# EAGLE board micromouse_board_revB_V0.0.1 (EAGLE 9.4.2)

Size 128.4 x 85.52 mm. Coordinates in mm from the lower left corner, seen from the top.
Outline: 56.73,15.45 56.73,0 88.67,0 95.19,3.31 101.32,6.82 107.03,10.54 112.27,14.51 117.01,18.73 121.25,23.21 125.04,27.92 128.4,32.85 128.4,55.45 124.91,59.68 121.03,63.78 116.73,67.75 111.98,71.57 106.78,75.24 101.15,78.77 95.14,82.18 88.79,85.47 56.73,85.52 56.71,70.48 28.44,70.53 21.2,70.45 16.19,80.45 11.18,80.45 0,68.65 0,19.65 11.2,5.45 16.2,5.45 21.2,15.45 56.73,15.45
Copper layers (1+2*15+16): Top 0.0356mm / dielectric 1.5011mm / GND 0.0356mm / dielectric 0.1499mm / AGND 0.0356mm / dielectric 0.2007mm / Bottom 0.0356mm
Design rules "LaenPCBOrder *": minimum track width 6mil, minimum drill 13mil, track to track 6mil, track to pad 6mil, pad to pad 6mil, via to via 6mil, smd to smd 6mil, copper to edge 15mil, drill to drill 6mil, minimum pad ring 7mil, minimum via ring 7mil, stop-mask expansion 3mil, vias tented up to drill 0mil, thermal gap 10mil
Net classes: 0 default: width 0.254 mm, drill 0.178 mm, clearance 0.178 mm
Holes 3 mm at 12.2,10.45 12.2,75.45 61.4,10.45 61.4,75.45
Holes 2.3 mm at 108.4,36.55 108.4,51.35

## Footprints (pad centres in the part's own frame; a part is rotated, then mirrored left to right if it is on the bottom)
0603-CAP = smd 1.1 x 1: 1 -0.85,0; 2 0.85,0
1210 = smd 1.2 x 2: 1 -1.6,0; 2 1.6,0
LQFP-64 = smd 1.473 x 0.229: 1 -5.626,3.75; 2 -5.626,3.25; 3 -5.626,2.75; 4 -5.626,2.25; 5 -5.626,1.75; 6 -5.626,1.25; 7 -5.626,0.75; 8 -5.626,0.25; 9 -5.626,-0.25; 10 -5.626,-0.75; 11 -5.626,-1.25; 12 -5.626,-1.75; 13 -5.626,-2.25; 14 -5.626,-2.75; 15 -5.626,-3.25; 16 -5.626,-3.75; 33 5.626,-3.75; 34 5.626,-3.25; 35 5.626,-2.75; 36 5.626,-2.25; 37 5.626,-1.75; 38 5.626,-1.25; 39 5.626,-0.75; 40 5.626,-0.25; 41 5.626,0.25; 42 5.626,0.75; 43 5.626,1.25; 44 5.626,1.75; 45 5.626,2.25; 46 5.626,2.75; 47 5.626,3.25; 48 5.626,3.75 | smd 0.229 x 1.473: 17 -3.75,-5.626; 18 -3.25,-5.626; 19 -2.75,-5.626; 20 -2.25,-5.626; 21 -1.75,-5.626; 22 -1.25,-5.626; 23 -0.75,-5.626; 24 -0.25,-5.626; 25 0.25,-5.626; 26 0.75,-5.626; 27 1.25,-5.626; 28 1.75,-5.626; 29 2.25,-5.626; 30 2.75,-5.626; 31 3.25,-5.626; 32 3.75,-5.626; 49 3.75,5.626; 50 3.25,5.626; 51 2.75,5.626; 52 2.25,5.626; 53 1.75,5.626; 54 1.25,5.626; 55 0.75,5.626; 56 0.25,5.626; 57 -0.25,5.626; 58 -0.75,5.626; 59 -1.25,5.626; 60 -1.75,5.626; 61 -2.25,5.626; 62 -2.75,5.626; 63 -3.25,5.626; 64 -3.75,5.626
SOT23-5 = smd 0.6 x 1.2: 1 -0.95,-1.306; 2 0,-1.306; 3 0.95,-1.306; 4 0.95,1.306; 5 -0.95,1.306
1X04 = drill 1.016 pad 1.88: 1 0,0; 2 2.54,0; 3 5.08,0; 4 7.62,0
HTSS-103-XX-XX-D = drill 1.016 pad 1.524: 1 -2.54,-1.27; 2 -2.54,1.27; 3 0,-1.27; 4 0,1.27; 5 2.54,-1.27; 6 2.54,1.27
HTSS-102-XX-XX-D = drill 1.016 pad 1.524: 1 -1.27,-1.27; 2 -1.27,1.27; 3 1.27,-1.27; 4 1.27,1.27
MOLEX-1X2 = drill 1.016 square: 1 0,0 | drill 1.016: 2 2.54,0
1007 = smd 2 x 0.8: 1 0,1; 2 0,-1
LED-1206 = smd 1.2 x 1.4: A -1.5,0; C 1.5,0
EMITTER = drill 0.8 pad 1.5: + -1.27,-0.5; - 1.27,-0.5
DMN3150LW = smd 0.7 x 0.9: D 0,0.95; G -0.65,-0.95; S 0.65,-0.95
M0805 = smd 1.3 x 1.6: 1 -0.95,0; 2 0.95,0
0805 = smd 0.8 x 1.2: 1 -0.9,0; 2 0.9,0
0603-RES = smd 1.1 x 1: 1 -0.85,0; 2 0.85,0
RECEIVER = drill 0.8 pad 1.5: C 1.27,-0.5; E -1.27,-0.5
TACTILE_SWITCH_SMD_4.6X2.8MM = smd 0.9 x 1: 1 -2.05,-0.8; 2 2.05,-0.8; 3 2.05,0.8; 4 -2.05,0.8
SWITCH-SPDT = drill 1.016 pad 1.88: 1 0,2.54; 2 0,0; 3 0,-2.54
TESTPOINT_ROUND_2MM = smd 2 x 2: P$1 0,0
SOP65P640X120-17N = smd 1.57 x 0.41: 1 -2.87,2.275; 2 -2.87,1.625; 3 -2.87,0.975; 4 -2.87,0.325; 5 -2.87,-0.325; 6 -2.87,-0.975; 7 -2.87,-1.625; 8 -2.87,-2.275; 9 2.87,-2.275; 10 2.87,-1.625; 11 2.87,-0.975; 12 2.87,-0.325; 13 2.87,0.325; 14 2.87,0.975; 15 2.87,1.625; 16 2.87,2.275 | smd 2.105 x 3.115: 17 0,0
SOIC127P600X175-8N = smd 1.981 x 0.559: 1 -2.464,1.905; 2 -2.464,0.635; 3 -2.464,-0.635; 4 -2.464,-1.905; 5 2.464,-1.905; 6 2.464,-0.635; 7 2.464,0.635; 8 2.464,1.905
QFN-24-EP = smd 1.016 x 0.254: 1 -2.066,1.257; 2 -2.066,0.75; 3 -2.066,0.247; 4 -2.066,-0.287; 5 -2.066,-0.792; 6 -2.066,-1.297; 13 2.086,-1.297; 14 2.086,-0.792; 15 2.086,-0.287; 16 2.086,0.247; 17 2.086,0.75; 18 2.086,1.257 | smd 0.254 x 1.016: 7 -1.267,-2.122; 8 -0.762,-2.122; 9 -0.258,-2.122; 10 0.278,-2.122; 11 0.78,-2.122; 12 1.287,-2.122; 19 1.287,2.082; 20 0.78,2.082; 21 0.278,2.082; 22 -0.258,2.082; 23 -0.762,2.082; 24 -1.267,2.082 | smd 2.616 x 2.616: P$1 0.02,-0.01
JST_CONNECTOR_FEMALE = drill 0.889: + 0,1; - 0,-1
TPS73633(SOT-23) = smd 0.55 x 1: EN 0.95,-1.35; GND 0,-1.35; IN -0.95,-1.35; NR/FB 0.95,1.35; OUT -0.95,1.35
TPS76850(SOIC-8) = smd 0.55 x 1.5: EN(BAR) -0.635,-2.7; FB/NC -0.635,2.7; GND -1.905,-2.7; IN1 0.635,-2.7; IN2 1.905,-2.7; OUT1 0.635,2.7; OUT2 1.905,2.7; PG -1.905,2.7
MY_MM_MOTOR_MOUNT = drill 0.95 pad 2: L_CHA -20.375,26.73; L_CHB -20.375,24.19; L_GND -20.375,45.27; L_MOTOR_A -2,37.27; L_MOTOR_B -2,34.73; L_VCC -20.375,47.81; R_CHA 20.375,45.27; R_CHB 20.375,47.81; R_GND 20.375,26.73; R_MOTOR_A 2,34.73; R_MOTOR_B 2,37.27; R_VCC 20.375,24.19 | hole 2.286: 14.85,45; 14.85,27; -14.85,27; -14.85,45
RASPI_GPIO_B+_PIN = drill 1 pad 1.778 square: 1 -24.13,-1.27 | drill 1 pad 1.778: 2 -24.13,1.27; 3 -21.59,-1.27; 4 -21.59,1.27; 5 -19.05,-1.27; 6 -19.05,1.27; 7 -16.51,-1.27; 8 -16.51,1.27; 9 -13.97,-1.27; 10 -13.97,1.27; 11 -11.43,-1.27; 12 -11.43,1.27; 13 -8.89,-1.27; 14 -8.89,1.27; 15 -6.35,-1.27; 16 -6.35,1.27; 17 -3.81,-1.27; 18 -3.81,1.27; 19 -1.27,-1.27; 20 -1.27,1.27; 21 1.27,-1.27; 22 1.27,1.27; 23 3.81,-1.27; 24 3.81,1.27; 25 6.35,-1.27; 26 6.35,1.27; 27 8.89,-1.27; 28 8.89,1.27; 29 11.43,-1.27; 30 11.43,1.27; 31 13.97,-1.27; 32 13.97,1.27; 33 16.51,-1.27; 34 16.51,1.27; 35 19.05,-1.27; 36 19.05,1.27; 37 21.59,-1.27; 38 21.59,1.27; 39 24.13,-1.27; 40 24.13,1.27

## Placement (x,y rotation side)
C1  1.1uF  [0603-CAP]  62.84,54.16 0 top
C2  4.7uF  [0603-CAP]  77.5,67.55 270 top
C4  0.01uF  [0603-CAP]  80.3,67.55 270 top
C5  0.1uF  [0603-CAP]  51.81,35.44 90 top
C6  0.1uF  [0603-CAP]  70.05,29.01 270 top
C7  0.1uF  [0603-CAP]  87.95,55.3 180 top
C8  4.7uF  [0603-CAP]  62.7,56.35 0 top
C12  0.1 uF  [0603-CAP]  51.74,39.24 180 top
C13  0.01uF  [0603-CAP]  76.13,9.3 180 top
C15  10uF  [0603-CAP]  67.07,28.97 270 top
C16  2.2uF  [0603-CAP]  81.5,42.48 90 top
C17  0.1uF  [0603-CAP]  62.89,50.42 0 top
C18  4.7uF  [0603-CAP]  62.91,52.52 180 top
C20  1000pF  [0603-CAP]  74.7,78.35 180 top
C21  4.7uF  [0603-CAP]  83.8,73.15 270 top
C22  0.1uF  [0603-CAP]  83.85,68.95 90 top
C23  4.7uF  [0603-CAP]  88.1,57.9 0 top
C_3.3V1  10uF  [0603-CAP]  55.65,56.1 180 top
C_3.3V2  0.1uF  [0603-CAP]  55.5,59.15 180 top
C_5V1  0.1uF  [0603-CAP]  55.95,46.1 0 top
C_5V2  47uF  [1210]  48.3,57.95 90 top
C_BAT1  0.1uF  [0603-CAP]  51.55,52.55 180 top
C_BAT2  47uF  [1210]  51.3,57.95 270 top
C_E_H1  4.7uF  [0603-CAP]  100.28,36.16 90 top
C_E_H2  0.1uF  [0603-CAP]  97.55,36.2 90 top
C_ELF1  4.7uF  [0603-CAP]  94.06,56.35 0 top
C_ELF2  0.1uF  [0603-CAP]  89.79,43.89 180 top
C_EM_D1  4.7uF  [0603-CAP]  94.03,59.07 180 top
C_EM_D2  0.1uF  [0603-CAP]  97.54,32.53 270 top
C_ERF1  4.7uF  [0603-CAP]  94.14,48.48 180 top
C_ERF2  0.1uF  [0603-CAP]  94.09,45.9 180 top
C_GY_CP  2.2nF  [0603-CAP]  54.75,25.7 0 top
C_GY_REG  0.1uF  [0603-CAP]  55.9,39.2 0 top
C_GY_VDD  0.1uF  [0603-CAP]  55.95,42.85 0 top
C_NR  0.1uF  [0603-CAP]  55.85,49.35 180 top
CR1  STM32F103RET6  [LQFP-64]  76.56,55.96 0 top
IC1  LM321MFX  [SOT23-5]  47.6,30.4 270 top
J1  [1X04]  101.94,51.68 90 top
J3  HTSS-103-XX-XX-D  [HTSS-103-XX-XX-D]  64.3,-15.35 0 top  (outside the outline)
J4  [1X04]  99.2,51.7 90 top
J5  HTSS-103-XX-XX-D  [HTSS-103-XX-XX-D]  49.55,-15.3 0 top  (outside the outline)
J6  HTSS-102-XX-XX-D  [HTSS-102-XX-XX-D]  36.3,-15.35 0 top  (outside the outline)
JP1  [MOLEX-1X2]  64,42.7 90 top
JP3  [MOLEX-1X2]  64,37.3 90 top
L1  10uH  [1007]  55.95,65.05 180 top
LED_PWR  green  [LED-1206]  24.35,18 180 top
LEFT_FRONT_EMITTER  EMITTER  [EMITTER]  94.37,71 275 top
NMOS1  DMN3150LW  [DMN3150LW]  79.68,78.72 0 top
NMOS2  DMN3150LW  [DMN3150LW]  76.41,22.54 90 top
NMOS3  DMN3150LW  [DMN3150LW]  76.56,25.83 90 top
NMOS4  DMN3150LW  [DMN3150LW]  93.97,40.03 270 top
R1  1k  [M0805]  79.49,71.01 180 top
R2  10k  [0805]  76.29,28.89 90 top
R4  10k  [M0805]  76.25,18.5 180 top
R5  10k  [M0805]  53.05,30.3 180 top
R6  10k  [M0805]  76.4,13.15 0 top
R8  500m  [0805]  69.71,32.8 0 top
R9  500m  [0805]  69.61,35.65 0 top
R_ED1  5.6  [0603-RES]  94.16,51.02 180 top
R_ED2  5.6  [0603-RES]  94.11,53.68 180 top
R_ED_PD  47k  [0603-RES]  89.94,49.3 180 top
R_EH1  5.6  [0603-RES]  94.16,37.18 0 top
R_EH2  5.6  [0603-RES]  93.91,43.66 0 top
R_EH_PD  47k  [0603-RES]  94.07,34.53 180 top
R_ELF  10  [0603-RES]  83.82,77.45 90 top
R_ELF_PD  47k  [0603-RES]  79.94,74.07 0 top
R_ERF  10  [0603-RES]  73.32,28.8 270 top
R_ERF_PD  47k  [0603-RES]  63.76,28.93 270 top
R_PWR  1k  [0603-RES]  22.05,24.95 270 top
R_RLD  1.8k  [0603-RES]  89.86,51.81 0 top
R_RLF  1.8k  [0603-RES]  89.83,46.71 180 top
R_RLH  1.8k  [0603-RES]  93.78,62.08 180 top
R_RRD  1.8k  [0603-RES]  79.93,32.1 180 top
R_RRF  1.8k  [0603-RES]  80.05,29.49 0 top
R_RRH  1.8k  [0603-RES]  89.65,29.87 180 top
R_VM1  75k  [0603-RES]  51.62,49.42 180 top
R_VM2  25k  [0603-RES]  51.63,46.14 0 top
R_VM4  100k  [0603-RES]  74.45,75.75 180 top
R_VM5  100k  [0603-RES]  55.7,52.7 180 top
R_VM6  3.3k  [0603-RES]  51.7,42.85 0 top
R_VM7  1k  [0603-RES]  97.8,62.4 180 top
REC_LF  RECEIVER  [RECEIVER]  94.1,77.26 273 top
S1  RESET  [TACTILE_SWITCH_SMD_4.6X2.8MM]  31.31,18.25 0 top
S2  [SWITCH-SPDT]  15.31,62.2 180 top
S3  [SWITCH-SPDT]  10.7,62.2 0 top
TP1  [TESTPOINT_ROUND_2MM]  85,36.2 90 top
TP2  [TESTPOINT_ROUND_2MM]  108.6,44.45 90 top
TP3  [TESTPOINT_ROUND_2MM]  90,21.75 90 top
TP4  [TESTPOINT_ROUND_2MM]  89.3,66.85 90 top
TP5  [TESTPOINT_ROUND_2MM]  88.15,26.95 90 top
TP6  [TESTPOINT_ROUND_2MM]  86.45,24 90 top
U2  DRV8848PWPR  [SOP65P640X120-17N]  76.42,41.08 0 top
U3  ACS712ELCTR-20A-T  [SOIC127P600X175-8N]  63.22,62.41 0 top
U6  MPU-6000  [QFN-24-EP]  40.8,57.25 180 top
U$1  JST_CONNECTOR_FEMALE  [JST_CONNECTOR_FEMALE]  15.86,29.62 0 top
U$2  JST_CONNECTOR_FEMALE  [JST_CONNECTOR_FEMALE]  15.66,36.56 0 top
U$3  TPS73633(SOT-23)  [TPS73633(SOT-23)]  51.9,64.6 180 top
U$4  TPS76850(SOIC-8)  [TPS76850(SOIC-8)]  67.3,21.4 270 top
U$7  RECEIVER  [RECEIVER]  116.9,56.05 320 top
U$8  RECEIVER  [RECEIVER]  115.95,38.15 220 top
U$9  RECEIVER  [RECEIVER]  90.4,5.38 267 top
U$11  EMITTER  [EMITTER]  121.6,51.85 322 top
U$12  MY_MM_MOTOR_MOUNT  [MY_MM_MOTOR_MOUNT]  23.91,-62.76 270 top  (outside the outline)
U$13  EMITTER  [EMITTER]  90.56,11.52 265 top
U$17  EMITTER  [EMITTER]  119.9,44.65 218 top
U$18  EMITTER  [EMITTER]  112.8,60.95 0 top
U$19  EMITTER  [EMITTER]  114.7,28.45 180 top
U$20  RECEIVER  [RECEIVER]  92.65,26.8 180 top
U$21  RECEIVER  [RECEIVER]  105.8,63.5 0 top
X1  RASPI_GPIO_B+#_PIN  [RASPI_GPIO_B+_PIN]  4.65,43.1 90 top

## Library data of the parts
C1 C2 C4-C8 C12 C13 C15-C18 C20-C23 C_3.3V1 C_3.3V2 C_5V1 C_5V2 C_BAT1 C_BAT2 C_E_H1 C_E_H2 C_ELF1 C_ELF2 C_EM_D1 C_EM_D2 C_ERF1 C_ERF2 C_GY_CP C_GY_REG C_GY_VDD C_NR IC1 J3 J5 J6 JP1 JP3 L1 LED_PWR LEFT_FRONT_EMITTER NMOS1-NMOS4 R2 R8 R9 R_ED1 R_ED2 R_ED_PD R_EH1 R_EH2 R_EH_PD R_ELF R_ELF_PD R_ERF R_ERF_PD R_PWR R_RLD R_RLF R_RLH R_RRD R_RRF R_RRH R_VM1 R_VM2 R_VM4-R_VM7 REC_LF S2 S3 TP1-TP6 U$1-U$4 U$7-U$9 U$11-U$13 U$17-U$21 = micromouse-board-added-piconnector
CR1 = micromouse-board-added-piconnector; MANUFACTURER_PART_NUMBER: STM32F103RET6; VENDOR: STMicroelectronics
J1 J4 = micromouse-board-added-piconnector; PROD_ID: CONN-09696
R1 R4-R6 = rcl; SPICEPREFIX: R
S1 = micromouse-board-added-piconnector; PROD_ID: SWCH-13065
U2 = micromouse-board-added-piconnector; AVAILABILITY: Unavailable; DESCRIPTION: 2A Dual H-Bridge Motor Driver _PWM Control_ 16-HTSSOP -40 to 85; MF: Texas Instruments; MP: DRV8848PWPR; PACKAGE: HTSSOP-16 Texas Instruments; PRICE: None
U3 = micromouse-board-added-piconnector; AVAILABILITY: Unavailable; DESCRIPTION: Fully Integrated, Hall Effect-Based Linear Current Sensor IC with 2.1 kVRMS Voltage Isolation and a Low-Resistance Cu...; MF: Allegro; MP: ACS712ELCTR-20A-T; PACKAGE: SOIC-8 Allegro MicroSystems LLC; PRICE: None
U6 = micromouse-board-added-piconnector; PROD_ID: IC-11089; SF_ID: SEN-11234
X1 = raspberrypi_bastelstube_v13

## Nets
3.3V: C1.2 C2.2 C4.2 C7.1 C8.2 C17.1 C18.2 C21.2 C22.1 C23.2 C_3.3V1.1 C_3.3V2.1 C_GY_VDD.1 CR1.1 CR1.13 CR1.19 CR1.32 CR1.48 CR1.64 J1.4 J4.2 L1.1 R4.2 R5.2 R6.2 U6.13 U$3.OUT X1.1 X1.17
5V: C6.1 C12.1 C15.1 C16.1 C_5V1.1 C_5V2.1 C_E_H1.1 C_E_H2.1 C_ELF1.1 C_ELF2.1 C_EM_D1.1 C_EM_D2.1 C_ERF1.1 C_ERF2.1 IC1.5 J3.4 J5.4 LEFT_FRONT_EMITTER.+ R2.1 R_PWR.2 R_VM4.1 U2.11 U2.12 U2.14 U3.8 U$3.EN U$3.IN U$4.OUT1 U$4.OUT2 U$11.+ U$12.L_VCC U$12.R_VCC U$13.+ U$18.+ X1.2 X1.4
(USART1)_RX: CR1.43 J4.4 X1.10
(USART1)_TX: CR1.42 J4.3 X1.8
A3.3V: L1.2 REC_LF.C U$7.C U$8.C U$9.C U$20.C U$21.C
AGND: C_GY_CP.2 C_GY_REG.2 C_GY_VDD.2 R_RLD.1 R_RLF.1 R_RLH.1 R_RRD.1 R_RRF.1 R_RRH.1 R_VM2.1 R_VM5.2 U2.13 U3.5 U6.1 U6.11 U6.18
BATT_CONN: U$1.+ U$2.-
CURRENT_SENSE: C20.1 CR1.20 IC1.4 R_VM6.2
D2_EM: R_ED1.2 R_ED2.2 U$17.-
D_EM: U$11.- U$17.+
EM_D: CR1.59 NMOS2.G R_ED_PD.2
EM_H: CR1.62 NMOS4.G R_EH_PD.2
EM_LF: CR1.58 NMOS1.G R_ELF_PD.2
EM_RF: CR1.61 NMOS3.G R_ERF_PD.2
ENC_LA: CR1.40 J5.6 U$12.L_CHA
ENC_LB: CR1.39 J5.5 U$12.L_CHB
ENC_RA: CR1.37 J3.6 U$12.R_CHA
ENC_RB: CR1.38 J3.5 U$12.R_CHB
GND: C1.1 C2.1 C4.1 C5.2 C6.2 C7.2 C8.1 C12.2 C13.2 C15.2 C16.2 C17.2 C18.1 C21.1 C22.2 C23.1 C_3.3V1.2 C_3.3V2.2 C_5V1.2 C_5V2.2 C_BAT1.2 C_BAT2.2 C_E_H1.2 C_E_H2.2 C_ELF1.2 C_ELF2.2 C_EM_D1.2 C_EM_D2.2 C_ERF1.2 C_ERF2.2 C_NR.2 CR1.12 CR1.18 CR1.31 CR1.47 CR1.63 IC1.2 J1.1 J3.3 J4.1 J5.3 LED_PWR.C NMOS1.S NMOS2.S NMOS3.S NMOS4.S R1.2 R8.1 R9.1 R_ED_PD.1 R_EH_PD.1 R_ELF_PD.1 R_ERF_PD.1 S1.1 S1.2 S3.1 U$1.- U$3.GND U$4.EN(BAR) U$4.GND U$12.L_GND U$12.R_GND X1.6 X1.9 X1.14 X1.20 X1.25 X1.30 X1.34 X1.39
H2_EM: R_EH1.2 R_EH2.2 U$19.-
H_EM: U$18.- U$19.+
I2C_SCL: CR1.29 R4.1 U6.23
I2C_SDA: CR1.30 R5.1 U6.24
INT: CR1.28 U6.12
LEFT_MOTOR_H: J5.2 JP1.1 U2.2 U$12.L_MOTOR_A
LEFT_MOTOR_L: J5.1 JP1.2 U2.4 U$12.L_MOTOR_B
LF_EM: LEFT_FRONT_EMITTER.- R_ELF.2
MUX_EN: CR1.44
N$1: C13.1 U3.6
N$4: CR1.10 S3.2
N$5: NMOS3.D R_ERF.1
N$6: R6.1 S3.3
N$7: NMOS1.D R_ELF.1
N$9: CR1.60 R1.1
N$12: R2.2 U2.8
N$15: R9.2 U2.3
N$18: NMOS2.D R_ED1.1 R_ED2.1
N$19: NMOS4.D R_EH1.1 R_EH2.1
N$20: R8.2 U2.6
N$21: IC1.1 R_VM4.2 R_VM5.1
N$24: R_VM7.2 U3.7
N$26: C_NR.1 U$3.NR/FB
N$27: LED_PWR.A R_PWR.1
N$28: C_GY_REG.1 U6.10
N$29: C_GY_CP.1 U6.20
N$31: C20.2 IC1.3 R_VM6.1 R_VM7.1
NRST: C5.1 CR1.7 S1.3 S1.4
NSLEEP: U2.1
PWM_MOTOR_1: CR1.15 J6.1 U2.16
PWM_MOTOR_2: CR1.16 J6.2 U2.15
PWM_MOTOR_3: CR1.26 J6.3 U2.9
PWM_MOTOR_4: CR1.27 J6.4 U2.10
REC_LD: CR1.23 R_RLD.2 TP2.P$1 U$7.E
REC_LF: CR1.22 R_RLF.2 REC_LF.E TP1.P$1
REC_LH: CR1.8 R_RLH.2 TP4.P$1 U$21.E
REC_RD: CR1.24 R_RRD.2 TP5.P$1 U$8.E
REC_RF: CR1.25 R_RRF.2 TP6.P$1 U$9.E
REC_RH: CR1.9 R_RRH.2 TP3.P$1 U$20.E
RF_EM: R_ERF.2 U$13.-
RIGHT_MOTOR_H: J3.2 JP3.1 U2.7 U$12.R_MOTOR_A
RIGHT_MOTOR_L: J3.1 JP3.2 U2.5 U$12.R_MOTOR_B
SPI2_MISO: CR1.35 X1.21
SPI2_MOSI: CR1.36 X1.19
SPI2_NSS: CR1.33 X1.24
SPI2_SCK: CR1.34 X1.23
SWCLK: CR1.49 J1.2
SWDIO: CR1.46 J1.3
V_BATT: C_BAT1.1 C_BAT2.1 R_VM1.2 S2.2 U3.2 U3.4 U$4.IN1 U$4.IN2
V_BATT_POWER: S2.3 U3.1 U3.3 U$2.+
VBAT_SENSE: CR1.17 R_VM1.1 R_VM2.2

## Tracks (layer width: path | path; a pad name or v marks a point on that pad's centre or on a via)
3.3V  (28 unrouted)
5V  (35 unrouted)
(USART1)_RX  (2 unrouted)
(USART1)_TX  (2 unrouted)
A3.3V  (6 unrouted)
AGND  (15 unrouted)
BATT_CONN  (1 unrouted)
CURRENT_SENSE  (3 unrouted)
D2_EM  (2 unrouted)
D_EM  (1 unrouted)
EM_D  (2 unrouted)
EM_H  (2 unrouted)
EM_LF  (2 unrouted)
EM_RF  (2 unrouted)
ENC_LA  (2 unrouted)
ENC_LB  (2 unrouted)
ENC_RA  (2 unrouted)
ENC_RB  (2 unrouted)
GND  (69 unrouted)
H2_EM  (2 unrouted)
H_EM  (1 unrouted)
I2C_SCL  (2 unrouted)
I2C_SDA  (2 unrouted)
INT  (1 unrouted)
LEFT_MOTOR_H  (3 unrouted)
LEFT_MOTOR_L  (3 unrouted)
LF_EM  (1 unrouted)
N$1  (1 unrouted)
N$4  (1 unrouted)
N$5  (1 unrouted)
N$6  (1 unrouted)
N$7  (1 unrouted)
N$9  (1 unrouted)
N$12  (1 unrouted)
N$15  (1 unrouted)
N$18  (2 unrouted)
N$19  (2 unrouted)
N$20  (1 unrouted)
N$21  (2 unrouted)
N$24  (1 unrouted)
N$26  (1 unrouted)
N$27  (1 unrouted)
N$28  (1 unrouted)
N$29  (1 unrouted)
N$31  (3 unrouted)
NRST  (3 unrouted)
PWM_MOTOR_1  (2 unrouted)
PWM_MOTOR_2  (2 unrouted)
PWM_MOTOR_3  (2 unrouted)
PWM_MOTOR_4  (2 unrouted)
REC_LD  (3 unrouted)
REC_LF  (3 unrouted)
REC_LH  (3 unrouted)
REC_RD  (3 unrouted)
REC_RF  (3 unrouted)
REC_RH  (3 unrouted)
RF_EM  (1 unrouted)
RIGHT_MOTOR_H  (3 unrouted)
RIGHT_MOTOR_L  (3 unrouted)
SPI2_MISO  (1 unrouted)
SPI2_MOSI  (1 unrouted)
SPI2_NSS  (1 unrouted)
SPI2_SCK  (1 unrouted)
SWCLK  (1 unrouted)
SWDIO  (1 unrouted)
V_BATT  (7 unrouted)
V_BATT_POWER  (3 unrouted)
VBAT_SENSE  (2 unrouted)

## Text on the board
tNames: BULLBOTS / UGA 2019
Document: Notes / ----------------------- / Bottom layer - GND / Add net classes / Add power planes / Use vector font